# Altium PCB PD Stepper V1.PcbDoc (part 2 of 2)
Units mm, origin at the board's own origin, x right, y up, seen from the top; angles counter-clockwise.
Board outline 42.3 x 42.32 mm, 4 copper layers (Top Layer, Int1 (GND), Int2 (PWR), Bottom Layer), stack 1.451 mm thick; 69 components, 55 nets, 310 pads, 250 vias.
Unrouted connection lines stored in the file: 77.
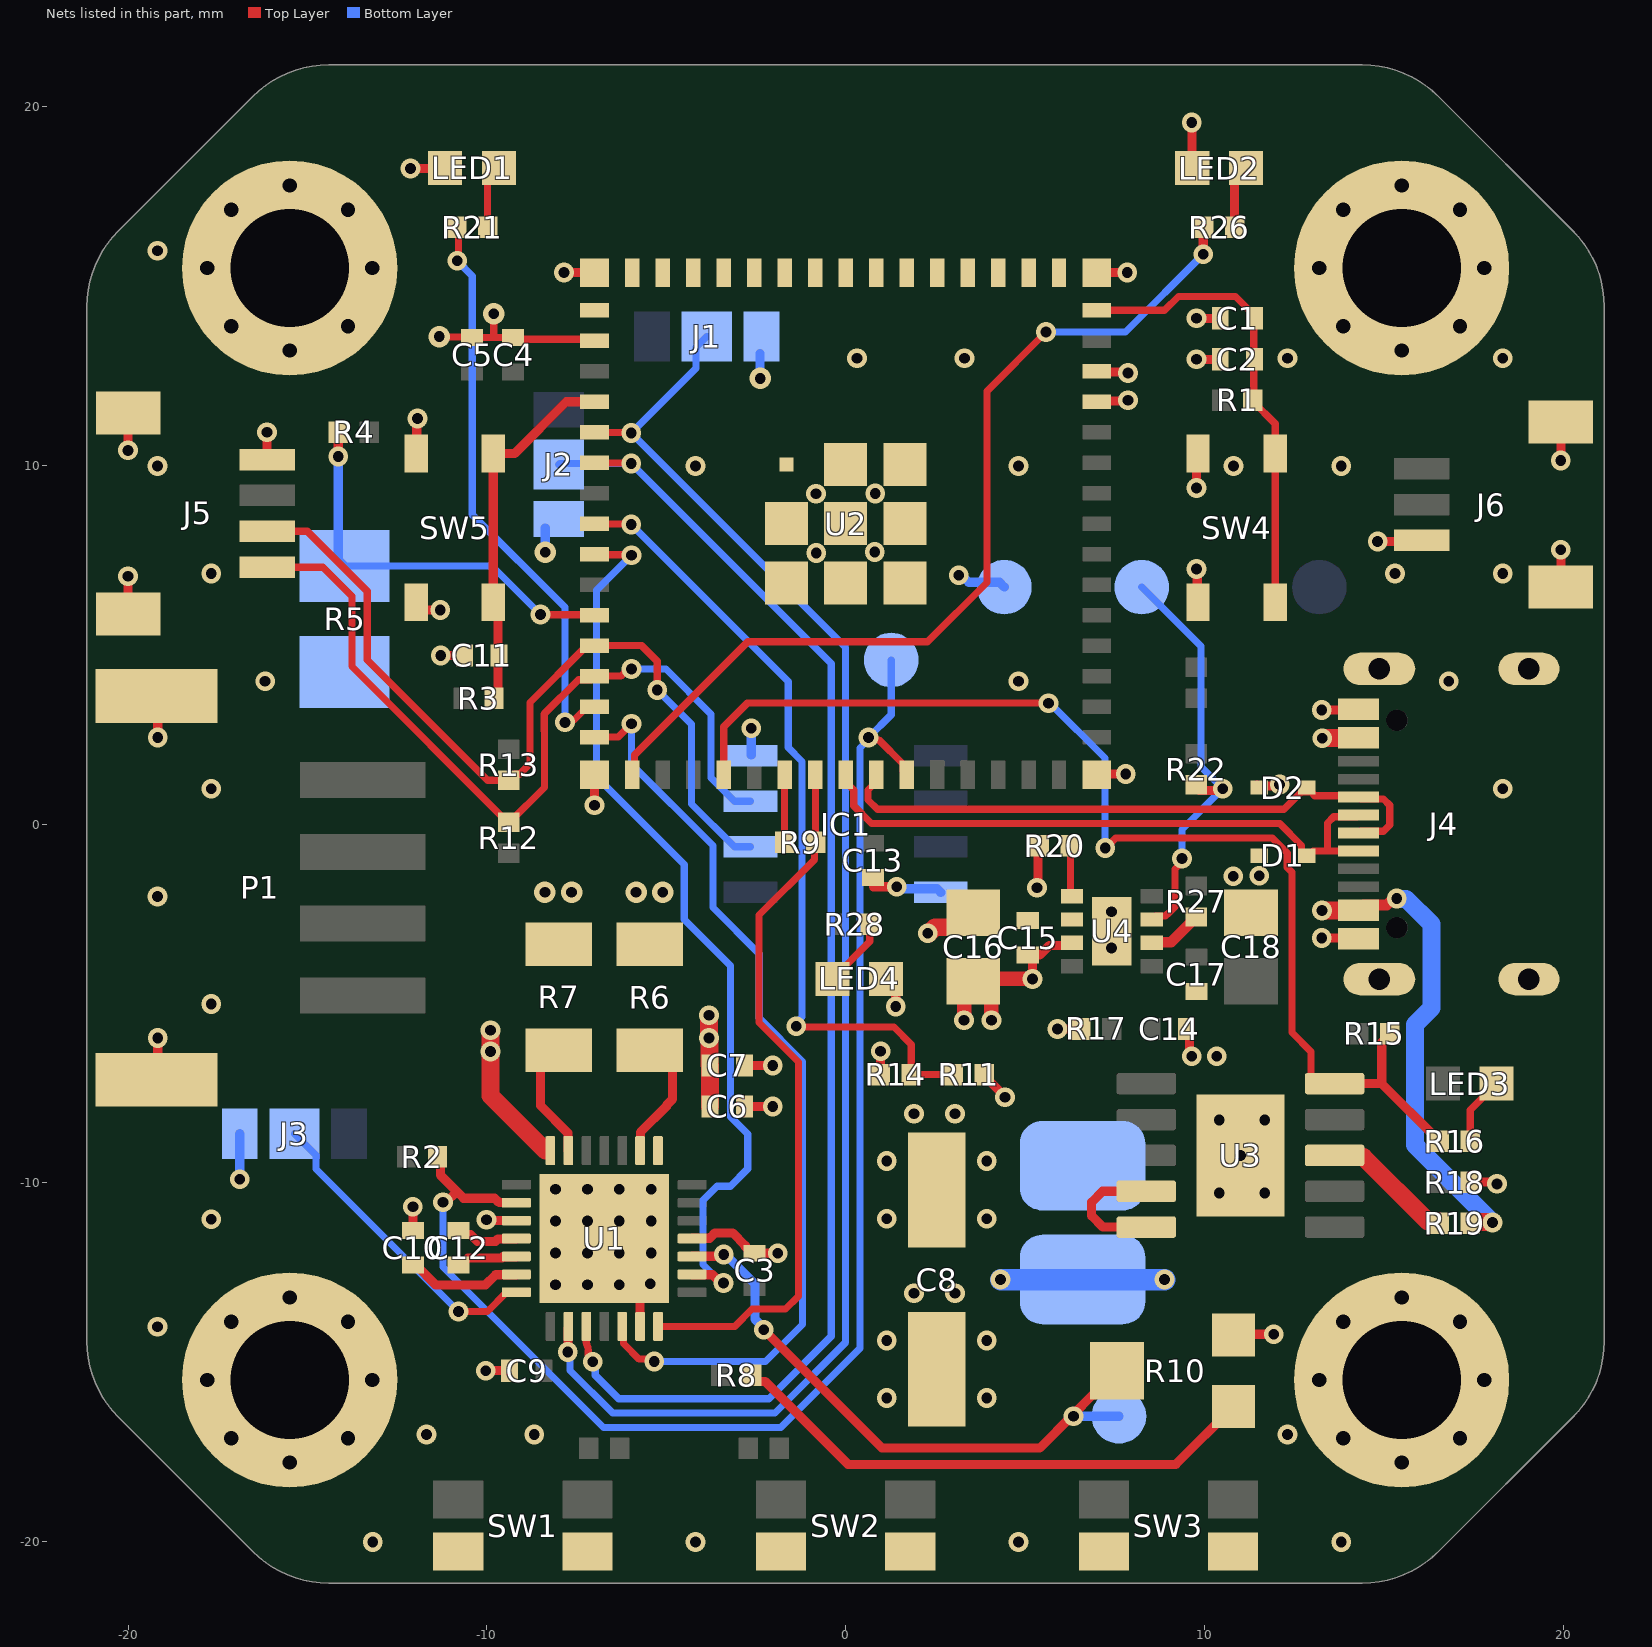
[diagram p4: the nets of this part, all layers, seen from the top]

## Via types
v1: diameter 0.55, hole 0.3, Top Layer to Bottom Layer, tented both sides, 180 vias
v2: diameter 0.7, hole 0.4, Top Layer to Bottom Layer, tented both sides, 32 vias
v3: diameter 0.6, hole 0.3, Top Layer to Bottom Layer, 16 vias
v4: diameter 0.6, hole 0.3, Top Layer to Bottom Layer, tented both sides, 14 vias
v5: diameter 1, hole 0.5, Top Layer to Bottom Layer, tented both sides, 8 vias

## Nets (pads, with @x,y where several pads share a name; then routed paths per layer and width w, separated by ;. In a path a pad name is that pad's centre, name@x,y a point inside that pad or via, vN(x,y) a via of type N, cw(c..) or ccw(c..) an arc to the next point about the centre after c; other vN are vias at no path point) (continued)
GND: C1.2 C2.2 C3.2 C4.2 C5.2 C6.1 C7.1 C8.2 C9.2 C11.2 C13.2 C14.1 C15.1 C16.2 C17.1 C18.2 D1.1 D2.1 IC1.4 IC1.8 J1.3 J2.3 J3.3 J4.A1_B12 J4.B1_A12 J4.S1 J4.S2 J4.S3 J4.S4 J5.1 J5.S1 J5.S2 J6.1 J6.S1 J6.S2 LED1.1 LED2.1 LED4.1 P1.P1 P1.P2 pad.34 pad.35@6.604,-12.7 pad.36@4.425,6.604 R5.1 R6.2 R7.2 R10.3 R14.1 R18.2 SW1.2_1 SW1.2_2 SW2.2_1 SW2.2_2 SW3.2_1 SW3.2_2 SW4.1 SW4.2 SW5.1 SW5.2 U1.3 U1.13 U1.18 U1.29 U2.1 U2.2 U2.42 U2.43 U2.46 U2.47 U2.48 U2.49 U2.50 U2.51 U2.52 U2.53 U2.54 U2.55 U2.56 U2.57 U2.58 U2.59 U2.60 U2.61 U2.61_1 U2.61_2 U2.61_3 U2.61_4 U2.61_5 U2.61_6 U2.61_7 U2.61_8 U2.62 U2.63 U2.64 U2.65 U3.0 U4.3 U4.11 | length 51.7
  Top Layer w0.2: v4(-11.332,13.589) -11.318,13.575 -10.428,13.575 C5.2@-10.414,13.561 -9.842,13.561 ; v4(-9.808,14.224) -9.808,13.595 -9.842,13.561 ; U2.2@-7,13.472 -7.044,13.516 -9.226,13.516 C4.2@-9.271,13.561 -9.842,13.561
  Top Layer w0.254: J5.S2@-20.004,6.257 v1(-20.004,6.904) ; v1(-20.004,10.416) J5.S1@-20.004,11.063 ; P1.P2@-19.212,-6.731 -19.177,-6.696 v1(-19.177,-5.969) ; P1.P1@-19.212,3.175 -19.177,3.14 v1(-19.177,2.413) ; v1(-16.129,10.922) -16.129,10.333 -15.956,10.16 J5.1@-15.605,10.16 ; v1(-12.129,18.276) LED1.1@-11.482,18.276 ; SW5.1@-11.975,6.196 -11.975,6.167 -11.777,5.969 v1(-11.303,5.969) ; SW5.2@-11.975,10.314 -11.956,10.332 -11.956,11.285 v1(-11.938,11.303) ; v1(-11.287,4.699) C11.2@-10.64,4.699 ; v1(-10.033,-15.24) -9.386,-15.24 C9.2@-9.378,-15.232 ; v1(-10.013,-11.034) -9.998,-11.049 -9.189,-11.049 U1.3@-9.181,-11.057 ; v1(-7.849,15.372) U2.62@-7,15.372 ; v1(-7,0.523) U2.63@-7,1.372 ; U1.29@-5.745,-13.193 -5.731,-13.207 U1.13@-5.731,-14.007 ; U1.18@-4.281,-11.557 -4.273,-11.549 -3.799,-11.549 -3.769,-11.519 -3.76,-11.519 -3.642,-11.401 -3.153,-11.401 -2.8,-11.754 -2.8,-11.781 -2.615,-11.966 C3.2@-2.54,-11.966 v1(-1.893,-11.966) ; C6.1@-2.806,-7.874 v1(-2.032,-7.874) ; C7.1@-2.806,-6.731 v1(-2.032,-6.731) ; 0.778,-1.75 v1(1.425,-1.75) ; R14.1@0.965,-6.985 0.97,-6.98 0.97,-6.343 v1(0.975,-6.338) ; LED4.1@1.385,-4.318 1.397,-4.33 v1(1.397,-5.09) ; v1(5.207,-4.318) 5.207,-3.782 5.334,-3.655 5.409,-3.655 5.678,-3.386 6.237,-3.386 U4.3@6.309,-3.313 ; U2.64@7,1.372 7.025,1.397 v1(7.807,1.397) ; U2.65@7,15.372 v1(7.849,15.372) ; U2.42@7.016,11.772 7.036,11.792 7.855,11.792 v1(7.874,11.811) ; U2.43@7.016,12.622 7.041,12.597 7.85,12.597 v1(7.874,12.573) ; C14.1@9.497,-5.715 9.586,-5.804 9.586,-6.331 9.652,-6.397 v1(9.652,-6.477) ; v1(9.652,19.558) 9.652,18.3 LED2.1@9.664,18.288 ; v1(9.779,7.112) 9.802,7.089 9.802,6.219 SW4.1@9.825,6.196 ; v1(9.779,9.37) SW4.2@9.779,10.017 ; v1(9.779,12.954) C2.2@10.426,12.954 ; v1(9.779,14.097) C1.2@10.426,14.097 ; R10.3@11.094,-14.224 v1(11.938,-14.224) ; D2.1@11.468,1.085 11.495,1.059 12.056,1.059 v1(12.099,1.101) ; v1(13.272,-3.175) J4.A1_B12@14.097,-3.175 ; v1(13.272,3.175) J4.B1_A12@14.097,3.175 ; v1(14.831,7.874) J6.1@15.478,7.874 ; R18.2@17.585,-9.898 17.663,-9.976 18.104,-9.976 v1(18.161,-10.033) ; J6.S1@19.939,7.001 v1(19.939,7.648) ; v1(19.939,10.132) J6.S2@19.939,10.779
  Top Layer w0.4: v1(3.302,-5.473) C16.2@3.302,-4.826 ; C16.2@3.887,-4.302 3.903,-4.318 v1(5.207,-4.318) ; v1(4.064,-5.473) C16.2@4.064,-4.826
  Bottom Layer w0.254: v1(-16.891,-9.906) J3.3@-16.891,-8.636 ; J2.3@-8.382,8.255 -8.375,8.248 v4(-8.375,7.573) ; IC1.8@-2.633,1.922 v1(-2.633,2.667) ; v4(-2.384,12.422) J1.3@-2.384,13.112 ; v1(1.425,-1.75) 1.482,-1.807 2.552,-1.807 IC1.4@2.65,-1.905 ; v1(3.155,6.937) 3.235,6.937 3.433,6.739 4.29,6.739 pad.36@4.425,6.604
  Bottom Layer w0.6: v1(4.318,-12.7) pad.35@6.604,-12.7 v1(8.89,-12.7)
  other v1: -13.184,-20.018 -4.184,-20.018 4.816,-20.018 13.816,-20.018 -11.684,-17.018 -8.684,-17.018 12.316,-17.018 1.143,-16.002 3.937,-16.002 1.143,-14.398 3.937,-14.398 -19.184,-14.018 1.905,-13.081 3.048,-13.081 -17.684,-11.018 10.414,-10.287 11.684,-10.287 11.007,-9.239 10.414,-8.255 11.684,-8.255 10.347,-6.477 -17.684,-5.018 7.413,-3.456 7.413,-2.444 -19.184,-2.018 10.804,-1.458 11.532,-1.444 -17.684,0.982 18.316,0.982 -16.184,3.982 4.816,3.982 16.816,3.982 -17.684,6.982 15.316,6.982 18.316,6.982 -0.819,7.556 0.809,7.581 -0.825,9.21 0.828,9.216 -19.184,9.982 -4.184,9.982 4.816,9.982 10.816,9.982 13.816,9.982 0.316,12.982 3.316,12.982 12.316,12.982 18.316,12.982 -19.184,15.982
  other v2: -15.5,-17.8 15.5,-17.8 -17.126,-17.126 -13.874,-17.126 13.874,-17.126 17.126,-17.126 -17.8,-15.5 -13.2,-15.5 13.2,-15.5 17.8,-15.5 -17.126,-13.874 -13.874,-13.874 13.874,-13.874 17.126,-13.874 -15.5,-13.2 15.5,-13.2 -15.5,13.2 15.5,13.2 -17.126,13.874 -13.874,13.874 13.874,13.874 17.126,13.874 -17.8,15.5 -13.2,15.5 13.2,15.5 17.8,15.5 -17.126,17.126 -13.874,17.126 13.874,17.126 17.126,17.126 -15.5,17.8 15.5,17.8
  other v3: -8.088,-12.847 -7.199,-12.847 -6.31,-12.847 -5.45,-12.818 -8.088,-11.958 -7.199,-11.958 -6.31,-11.958 -5.421,-11.958 -8.088,-11.069 -7.199,-11.069 -6.31,-11.069 -5.421,-11.069 -8.088,-10.18 -7.199,-10.18 -6.31,-10.18 -5.421,-10.18
  other v4: -8.382,-1.905 -7.64,-1.905 -5.842,-1.905 -5.1,-1.905
INDEX: U1.12 U2.15 | length 26
  Top Layer w0.2: U2.15@-7,2.422 -6.341,2.422 v1(-5.969,2.794) ; U1.12@-6.231,-14.007 -6.196,-14.042 -6.196,-14.486 -5.763,-14.919 -5.401,-14.919 v1(-5.334,-14.986)
  Bottom Layer w0.2: v1(-5.969,2.794) -5.969,1.668 -3.7,-0.601 -3.7,-2.329 -2.408,-3.621 -2.408,-5.416 -1.2,-6.624 -1.2,-13.952 -2.234,-14.986 v1(-5.334,-14.986)
LED1: R21.2 U2.14 | length 16
  Top Layer w0.2: v1@-10.795,15.734 R21.2@-10.795,16.637 ; v1(-7.826,2.833) -7.759,2.9 -7.572,2.9 -7.2,3.272 U2.14@-7,3.272
  Bottom Layer w0.2: v1(-10.829,15.7) -10.408,15.279 -10.408,8.624 -7.826,6.041 v1(-7.826,2.833)
LED2: R26.2 U2.16 | length 26
  Top Layer w0.2: U2.16@-5.95,1.372 -5.882,1.44 -5.882,1.928 -2.73,5.08 2.286,5.08 3.937,6.731 3.937,12.065 v1(5.588,13.716)
  Top Layer w0.254: v1(9.97,15.883) R26.2@9.97,16.53
  Bottom Layer w0.2: v1(5.588,13.716) 7.804,13.716 v1(9.97,15.883)
MS1: J1.2 U1.9 U2.5 | length 42.6
  Top Layer w0.2: U2.5@-6.993,10.915 v1@-5.991,10.915
  Top Layer w0.254: v1(-7.748,-14.723) -7.739,-14.714 -7.739,-14.06 U1.9@-7.731,-14.052
  Bottom Layer w0.2: v1(-7.748,-14.723) -7.681,-14.79 -7.681,-15.233 -6.492,-16.421 -2.197,-16.421 -1.972,-16.421 0,-14.449 0,-14.224 0,4.924 v1(-5.976,10.9) -4.17,12.706 -4.17,13.291 J1.2@-3.872,13.589
MS2: J2.2 U1.10 U2.6 | length 38.7
  Top Layer w0.2: U1.10@-7.231,-14.007 -7.231,-14.429 ccw(c-7.031,-14.428) -7.216,-14.503 cw(c-7.748,-14.723) -7.176,-14.787 ccw(c-6.977,-14.808) v1(-7.049,-14.995) ; U2.6@-6.993,10.065 v1@-5.991,10.065
  Bottom Layer w0.2: J2.2@-8.001,10.025 -7.976,10.05 v1(-5.976,10.05) -0.4,4.474 -0.4,-14.058 -0.4,-14.283 -2.138,-16.021 -2.363,-16.021 -6.327,-16.021 -6.982,-15.366 -6.982,-15.062 v1(-7.049,-14.995)
NetC1_1: C1.1 C2.1 R1.1 SW4.3 SW4.4 U2.45 | length 13.1
  Top Layer w0.2: U2.45@7,14.322 8.891,14.322 9.276,14.707 10.867,14.707 11.402,14.172 C1.1@11.402,14.097 11.378,14.073 11.378,11.835 R1.1@11.354,11.811 11.354,11.781 11.975,11.16 SW4.4@11.975,10.33 SW4.3@11.975,6.18
NetC10_1: C10.1 U1.6 | length 3.2
  Top Layer w0.254: C10.1@-12.065,-12.291 -11.99,-12.291 -11.428,-12.853 -10.042,-12.853 -9.754,-12.565 -9.189,-12.565 U1.6@-9.181,-12.557
NetC11_1: C11.1 R3.1 SW5.3 SW5.4 U2.4 | length 10.4
  Top Layer w0.254: R3.1@-9.694,3.363 -9.694,6.049 SW5.3@-9.825,6.18 SW5.4@-9.825,10.33 -9.228,10.33 -7.786,11.772 U2.4@-7,11.772
NetC12_1: C12.1 U1.4 | length 1.8
  Top Layer w0.254: C12.1@-10.795,-11.331 -10.687,-11.439 -10.46,-11.439 -10.263,-11.636 -9.764,-11.636 -9.693,-11.565 -9.189,-11.565 U1.4@-9.181,-11.557
NetC12_2: C12.2 U1.5 | length 1.7
  Top Layer w0.254: C12.2@-10.795,-12.291 -10.72,-12.291 -10.524,-12.095 -9.581,-12.095 -9.551,-12.065 -9.189,-12.065 U1.5@-9.181,-12.057
NetLED1_2: LED1.2 R21.1 | length 1.8
  Top Layer w0.2: R21.1@-9.982,16.637 -9.982,17.97 LED1.2@-9.664,18.288
NetLED2_2: LED2.2 R26.1 | length 1.8
  Top Layer w0.254: R26.1@10.846,16.637 10.846,17.97 LED2.2@11.164,18.288
NetLED3_1: LED3.1 R16.2 | length 1.9
  Top Layer w0.2: R16.2@17.415,-8.844 17.415,-7.973 LED3.1@18.149,-7.239
NetLED4_2: LED4.2 R28.1 | length 2
  Top Layer w0.2: LED4.2@-0.369,-4.318 0.672,-3.277 0.672,-2.808 R28.1@0.686,-2.794
NetR6_1: R6.1 U1.23 | length 3.5
  Top Layer w0.254: U1.23@-5.731,-9.107 -5.723,-9.099 -5.723,-8.598 -4.98,-7.855 -4.98,-7.825 -4.826,-7.671 -4.826,-6.78 -5.304,-6.302 R6.1@-5.461,-6.302
NetR7_1: R7.1 U1.27 | length 3.4
  Top Layer w0.254: R7.1@-8.001,-6.302 -8.031,-6.302 -8.509,-6.78 -8.509,-7.846 -7.739,-8.616 -7.739,-9.099 U1.27@-7.731,-9.107
NetR8_1: R8.1 R10.1 | length 15.1
  Top Layer w0.254: R8.1@-2.616,-15.367 -2.616,-15.397 -2.473,-15.54 -2.247,-15.54 0.066,-17.853 9.204,-17.853 R10.1@10.817,-16.24
NetR19_2: R19.2 U3.8 | length 3.7
  Top Layer w0.5: U3.8@13.632,-9.239 13.682,-9.289 14.44,-9.289 16.231,-11.08 16.531,-11.08 16.551,-11.1 R19.2@16.551,-11.13
NetR20_1: R20.1 U4.1 | length 1.4
  Top Layer w0.2: R20.1@6.266,-0.607 6.266,-1.97 U4.1@6.309,-2.013
NetR27_1: R27.1 U4.6 | length 1.6
  Top Layer w0.3: U4.6@8.534,-3.313 8.548,-3.3 9.07,-3.3 9.629,-2.741 9.629,-2.711 9.749,-2.591 R27.1@9.779,-2.591
NetU3_4: U3.4 U3.5 | length 3.7
  Top Layer w0.254: U3.5@8.382,-11.239 7.175,-11.239 6.858,-10.922 6.858,-10.541 7.16,-10.239 U3.4@8.382,-10.239
NTC: R4.2 R5.2 U2.11 | length 11.3
  Top Layer w0.2: v1(-8.509,5.842) -8.499,5.832 -7.01,5.832 U2.11@-7,5.822
  Top Layer w0.254: v1(-14.146,10.248) R4.2@-14.146,10.837
  Bottom Layer w0.2: R5.2@-13.97,7.191 -9.858,7.191 v1(-8.509,5.842)
  Bottom Layer w0.254: v1(-14.146,10.248) -14.146,7.367 R5.2@-13.97,7.191
PDN_UART: R9.2 U1.14 U2.22 | length 19.9
  Top Layer w0.2: U1.14@-5.231,-14.007 -3.092,-14.007 -2.607,-13.522 -1.676,-13.522 -1.318,-13.164 -1.318,-6.632 -2.413,-5.537 -2.413,-2.54 -0.864,-0.991 -0.864,-0.534 R9.2@-0.838,-0.508 -0.844,-0.502 -0.844,1.366 U2.22@-0.85,1.372
PG: R15.1 R16.1 U2.19 U3.10 | length 33.1
  Top Layer w0.2: U2.19@-3.4,1.372 -3.4,2.713 -2.744,3.369 v1(5.655,3.369) ; v1(7.239,-0.668) 7.252,-0.668 7.531,-0.389 11.896,-0.389 12.312,-0.805 12.312,-1.213 12.446,-1.347 12.446,-5.815 12.977,-6.346 12.977,-7.039 13.177,-7.239 U3.10@13.632,-7.239
  Top Layer w0.254: U3.10@13.632,-7.239 14.946,-7.239 ; R15.1@15.164,-5.842 15.164,-5.872 14.946,-6.09 14.946,-7.239 ; R16.1@16.551,-8.844 16.551,-8.814 16.408,-8.671 16.378,-8.671 15.027,-7.321 14.946,-7.239
  Bottom Layer w0.2: v1(5.655,3.369) 5.699,3.369 7.232,1.836 7.232,-0.661 v1(7.239,-0.668)
PG_3V3: pad.36@8.255,6.604 R22.1 U4.7 | length 11.9
  Top Layer w0.2: U4.7@8.534,-2.663 8.634,-2.563 8.91,-2.563 8.96,-2.513 8.971,-2.513 9.179,-2.305 9.179,-1.255 9.376,-1.059 v1(9.376,-0.964)
  Top Layer w0.254: R22.1@9.87,0.929 10.457,0.929 v1(10.514,0.986)
  Bottom Layer w0.2: pad.36@8.255,6.604 9.906,4.953 9.906,1.594 v1(10.514,0.986) 9.376,-0.152 v1(9.376,-0.964)
SCL: IC1.7 J5.4 R12.1 U2.13 | length 23.1
  Top Layer w0.2: J5.4@-16.129,7.16 -14.574,7.16 -13.764,6.35 -13.764,4.387 -9.428,0.051 R12.1@-9.398,0.051 -9.368,0.051 -8.398,1.021 -8.398,2.592 -8.401,2.595 -8.401,3.071 -7.45,4.022 -7.1,4.022 U2.13@-7,4.122 -6.26,4.122 -6.064,4.318 v1(-5.969,4.318)
  Bottom Layer w0.2: v1(-5.969,4.318) -5.011,4.318 -3.753,3.06 -3.753,1.288 -3.1,0.635 IC1.7@-2.65,0.635
SDA: IC1.6 J5.3 R13.1 U2.12 | length 24.1
  Top Layer w0.2: J5.3@-16.129,8.16 -15.009,8.16 -13.335,6.486 -13.335,4.572 -9.982,1.219 R13.1@-9.398,1.219 -9.228,1.389 -9.091,1.389 -8.798,1.682 -8.798,2.427 -8.801,2.429 -8.801,3.384 -7.285,4.899 -7.073,4.899 U2.12@-7,4.972 -5.683,4.972 -5.25,4.539 v1(-5.25,3.736)
  Bottom Layer w0.2: v1(-5.25,3.736) -4.296,2.782 -4.296,0.561 -3.1,-0.635 IC1.6@-2.65,-0.635
SPREAD: J3.2 U1.7 | length 8.7
  Top Layer w0.2: v1(-10.795,-13.589) -9.983,-13.589 -9.451,-13.057 U1.7@-9.181,-13.057
  Bottom Layer w0.2: J3.2@-15.367,-8.636 -14.767,-9.236 -14.767,-9.617 v1(-10.795,-13.589)
STEP: U1.16 U2.9 | length 25.5
  Top Layer w0.2: U2.9@-7,7.522 -6.986,7.507 -5.983,7.507 v1(-5.969,7.493)
  Top Layer w0.254: U1.16@-4.281,-12.557 -4.273,-12.565 -3.711,-12.565 -3.483,-12.793 v1(-3.403,-12.793)
  Bottom Layer w0.2: v1(-5.969,7.493) -6.944,6.518 -6.944,1.318 -4.5,-1.126 -4.5,-2.661 -3.208,-3.953 -3.208,-8.16 -2.729,-8.639 -2.729,-9.614 -3.213,-10.098 -3.583,-10.098 -3.976,-10.491 -3.976,-12.28 -3.463,-12.793 v1(-3.403,-12.793)
TMC_E\N\: pad.36@1.27,4.572 R2.1 U1.2 U2.25 | length 40.9
  Top Layer w0.2: v1(0.635,2.413) 0.702,2.346 0.926,2.346 1.6,1.672 1.6,1.472 U2.25@1.7,1.372
  Top Layer w0.254: R2.1@-11.379,-9.271 -11.295,-9.355 -11.295,-9.787 -10.821,-10.261 ; v1(-11.223,-10.546) -11.143,-10.546 -10.858,-10.261 -10.821,-10.261 ; U1.2@-9.181,-10.557 -9.189,-10.549 -9.647,-10.549 -9.677,-10.519 -9.702,-10.519 -9.789,-10.432 -10.65,-10.432 -10.821,-10.261
  Bottom Layer w0.2: v1(-11.223,-10.546) -11.223,-12.347 -6.75,-16.821 -1.807,-16.821 0.4,-14.614 0.4,2.121 0.635,2.356 v1(0.635,2.413) 1.27,3.048 pad.36@1.27,4.572
TX: R9.1 U2.21 | length 1.9
  Top Layer w0.2: R9.1@-1.702,-0.508 R9.1@-1.702,-0.508 U2.21@-1.701,1.371 ; U2.21@-1.701,1.371 U2.21@-1.7,1.372
USB_D_N: D1.2 J4.A7 J4.B7 U2.23 | length 17.5
  Top Layer w0.2: U2.23@0,1.372 0,1.172 0.225,0.947 0.225,0.506 0.72,0.011 12.101,0.011 12.712,-0.6 12.712,-0.789 12.812,-0.889 12.892,-0.889 13.031,-0.75 13.462,-0.75 ; J4.B7@14.3,-0.75 13.462,-0.75 ; J4.A7@14.3,0.25 14.25,0.2 13.606,0.2 13.43,0.024 13.43,-0.718 13.462,-0.75
USB_D_P: D2.2 J4.A6 J4.B6 U2.24 | length 17.3
  Top Layer w0.2: U2.24@0.85,1.372 0.85,1.172 0.625,0.947 0.625,0.672 0.886,0.411 12.222,0.411 12.7,0.889 12.979,0.889 13.079,0.789 14.261,0.789 J4.B6@14.3,0.75 14.35,0.7 14.994,0.7 15.17,0.524 15.17,-0.024 14.994,-0.2 14.35,-0.2 J4.A6@14.3,-0.25
VBUS: C6.2 C7.2 C8.1 C10.2 C15.2 C16.1 J4.A4_B9 J4.B4_A9 pad.35@6.604,-9.525 R11.2 R17.2 R19.1 R20.2 U1.22 U1.28 U4.2 | length 26.1
  Top Layer w0.254: C10.2@-12.065,-11.315 v1(-12.065,-10.668) ; R11.2@3.861,-6.985 3.861,-7.015 4.445,-7.599 v1(4.445,-7.62) ; v1(5.334,-1.778) 5.368,-1.744 5.368,-0.641 R20.2@5.402,-0.607 ; v1(5.906,-5.715) R17.2@6.553,-5.715
  Top Layer w0.3: J4.A4_B9@14.3,-2.4 14.443,-2.257 15.084,-2.257 15.218,-2.123 15.384,-2.123 v1@15.398,-2.109 ; v1(15.364,-2.075) v1@15.398,-2.109 ; v1@15.412,-2.123 v1@15.398,-2.109 ; v1@15.432,-2.075 v1@15.398,-2.109
  Top Layer w0.5: v1(-9.898,-5.748) -9.898,-7.575 -8.366,-9.107 ; v1(-3.81,-5.334) v1(-3.81,-5.969) -3.81,-5.983 -3.797,-5.996 -3.797,-6.716 C7.2@-3.782,-6.731 C6.2@-3.782,-7.874 ; v1(2.286,-3.048) 2.295,-3.057 2.309,-3.057 2.488,-2.879 3.41,-2.879 C16.1@3.81,-2.479 ; v1(13.28,-2.412) 13.286,-2.406 14.294,-2.406 J4.A4_B9@14.3,-2.4 ; v1@13.292,2.4 J4.B4_A9@14.3,2.4 ; R19.1@17.643,-11.099 18.024,-11.099 v1(18.034,-11.109)
  Bottom Layer w0.5: v1(15.364,-2.075) 15.374,-2.085 15.626,-2.085 16.33,-2.789 16.33,-5.133 15.874,-5.589 15.874,-8.949 v1(18.034,-11.109)
  other v1: 1.143,-11.002 3.937,-11.002 1.143,-9.398 3.937,-9.398 1.905,-8.081 3.048,-8.081 -9.898,-6.342 13.286,2.394
VBUS_SENSE: R11.1 R14.2 U2.8 | length 22.4
  Top Layer w0.2: U2.8@-6.993,8.365 v1@-5.991,8.365 ; v1(-1.375,-5.636) -1.348,-5.663 1.345,-5.663 1.829,-6.147 R14.2@1.829,-6.985 R11.1@2.997,-6.985
  Bottom Layer w0.2: v1(-5.976,8.35) -1.6,3.974 -1.6,2.13 -1.213,1.743 -1.213,-5.38 -1.375,-5.541 v1(-1.375,-5.636)
VREF: pad.36@7.62,-16.51 R10.2 U1.17 | length 16.9
  Top Layer w0.254: U1.17@-4.281,-12.057 -4.273,-12.049 -3.446,-12.049 v1(-3.401,-12.004) ; v1(-2.286,-14.097) 1.016,-17.399 5.408,-17.399 6.324,-16.484 6.894,-15.913 6.944,-15.913 7.567,-15.29 R10.2@7.567,-15.24
  Bottom Layer w0.254: v1(-3.401,-12.004) -3.34,-12.004 -2.531,-12.813 -2.531,-13.8 -2.286,-14.045 v1(-2.286,-14.097) ; v1(6.35,-16.51) pad.36@7.62,-16.51
pads on no net: IC1.3 IC1.5 J4. J4.A8 J4.B8 U1.20 U1.25 U2.7 U2.26 U2.28 U2.29 U2.35 U2.36 U2.37 U2.38 U2.39 U2.40 U2.41 U2.44 U4.8

## Polygon pours and split planes (outlines as drawn)
GND on Bottom Layer "GND_L04_P000" (solid, remove dead copper, pour order 0): -23.749,24.384 -23.749,-23.368 25.146,-23.368 25.146,24.511
GND on Top Layer " " (solid, remove dead copper, pour order 1): -23.749,24.384 -23.749,-23.368 25.146,-23.368 25.146,24.511
3V3 on Int2 (PWR) (split plane): 14.625,20.642 14.84,20.614 15.052,20.567 15.26,20.502 15.46,20.418 15.653,20.318 15.837,20.201 16.009,20.069 16.157,19.933 16.168,19.92 19.91,16.178 19.923,16.167 20.059,16.019 20.191,15.847 20.308,15.663 20.408,15.47 20.492,15.27 20.557,15.062 20.604,14.85 20.632,14.635 20.641,14.433 20.64,14.417 20.64,-14.417 20.641,-14.433 20.632,-14.635 20.604,-14.85 20.557,-15.062 20.492,-15.27 20.408,-15.47 20.308,-15.663 20.191,-15.847 20.059,-16.019 19.923,-16.167 19.91,-16.178 16.168,-19.92 16.157,-19.933 16.009,-20.069 15.837,-20.201 15.653,-20.318 15.46,-20.418 15.26,-20.502 15.052,-20.567 14.84,-20.614 14.625,-20.642 14.423,-20.651 14.407,-20.65 -14.407,-20.65 -14.423,-20.651 -14.625,-20.642 -14.84,-20.614 -15.052,-20.567 -15.26,-20.502 -15.46,-20.418 -15.653,-20.318 -15.837,-20.201 -16.009,-20.069 -16.157,-19.933 -16.168,-19.92 -19.91,-16.178 -19.923,-16.167 -20.059,-16.019 -20.191,-15.847 -20.308,-15.663 -20.408,-15.47 -20.492,-15.27 -20.557,-15.062 -20.604,-14.85 -20.632,-14.635 -20.641,-14.433 -20.64,-14.417 -20.64,14.417 -20.641,14.433 -20.632,14.635 -20.604,14.85 -20.557,15.062 -20.492,15.27 -20.408,15.47 -20.308,15.663 -20.191,15.847 -20.059,16.019 -19.923,16.167 -19.91,16.178 -16.168,19.92 -16.157,19.933 -16.009,20.069 -15.837,20.201 -15.653,20.318 -15.46,20.418 -15.26,20.502 -15.052,20.567 -14.84,20.614 -14.625,20.642 -14.423,20.651 -14.407,20.65 -8.636,20.65 -8.636,15.748 8.636,15.748 8.636,20.65 14.407,20.65 14.423,20.651
VBUS on Int2 (PWR) (split plane): 15.57,3.505 16.131,2.944 16.131,-2.436 14.882,-3.685 9.398,-3.685 9.333,-3.693 9.272,-3.719 9.242,-3.741 9.22,-3.759 5.972,-7.006 5.918,-7.061 5.878,-7.113 5.852,-7.174 5.844,-7.239 5.844,-10.31 4.527,-11.626 -1.972,-11.626 -2.037,-11.635 -2.098,-11.66 -2.15,-11.7 -4.676,-14.226 -9.04,-14.226 -12.575,-10.691 -12.575,-8.105 -8.786,-4.316 -1.778,-4.316 -1.713,-4.308 -1.652,-4.282 -1.6,-4.242 6.073,3.431 11.303,3.431 11.368,3.439 11.429,3.465 11.481,3.505 12.123,4.147 14.928,4.147
GND on Int1 (GND) (split plane): 14.625,20.642 14.84,20.614 15.052,20.567 15.26,20.502 15.46,20.418 15.653,20.318 15.837,20.201 16.009,20.069 16.157,19.933 16.168,19.92 19.91,16.178 19.923,16.167 20.059,16.019 20.191,15.847 20.308,15.663 20.408,15.47 20.492,15.27 20.557,15.062 20.604,14.85 20.632,14.635 20.641,14.433 20.64,14.417 20.64,-14.417 20.641,-14.433 20.632,-14.635 20.604,-14.85 20.557,-15.062 20.492,-15.27 20.408,-15.47 20.308,-15.663 20.191,-15.847 20.059,-16.019 19.923,-16.167 19.91,-16.178 16.168,-19.92 16.157,-19.933 16.009,-20.069 15.837,-20.201 15.653,-20.318 15.46,-20.418 15.26,-20.502 15.052,-20.567 14.84,-20.614 14.625,-20.642 14.423,-20.651 14.407,-20.65 -14.407,-20.65 -14.423,-20.651 -14.625,-20.642 -14.84,-20.614 -15.052,-20.567 -15.26,-20.502 -15.46,-20.418 -15.653,-20.318 -15.837,-20.201 -16.009,-20.069 -16.157,-19.933 -16.168,-19.92 -19.91,-16.178 -19.923,-16.167 -20.059,-16.019 -20.191,-15.847 -20.308,-15.663 -20.408,-15.47 -20.492,-15.27 -20.557,-15.062 -20.604,-14.85 -20.632,-14.635 -20.641,-14.433 -20.64,-14.417 -20.64,14.417 -20.641,14.433 -20.632,14.635 -20.604,14.85 -20.557,15.062 -20.492,15.27 -20.408,15.47 -20.308,15.663 -20.191,15.847 -20.059,16.019 -19.923,16.167 -19.91,16.178 -16.168,19.92 -16.157,19.933 -16.009,20.069 -15.837,20.201 -15.653,20.318 -15.46,20.418 -15.26,20.502 -15.052,20.567 -14.84,20.614 -14.625,20.642 -14.423,20.651 -14.407,20.65 -8.763,20.65 -8.763,15.748 8.509,15.748 8.509,20.65 14.407,20.65 14.423,20.651

## Other copper
Top Layer:
  rectangle net GND: -6.391,-3.955 -4.531,-1.397
  rectangle net GND: -8.931,-3.955 -7.071,-1.397
  pour cut-out: -9.398,-1.083 -9.398,-7.493 -8.636,-8.255 -4.826,-8.255 -4.171,-7.6 -4.171,-1.083
  region net GND: 12.053,-2.479 12.053,-1.37 11.721,-1.038 10.773,-1.038 10.426,-1.385 10.426,-2.352 10.553,-2.479
  pour cut-out: -8.907,21.16 -8.907,17.1 -7.7,15.893 7.638,15.893 8.89,17.145 8.89,21.16 8.412,21.16
  region net GND: 10.16,-5.894 10.41,-6.138 10.676,-6.138 10.676,-6.785 9.476,-6.785 9.262,-6.571 9.262,-5.486 9.525,-5.223 9.525,-4.436 10.16,-4.436
  region net VBUS: 6.622,-2.463 6.622,-2.863 5.882,-2.863 5.815,-2.93 5.024,-2.93 4.825,-3.129 3.06,-3.129 3.06,-1.829 4.661,-1.829 5.157,-1.445 5.693,-1.445 5.693,-2.46 6.619,-2.46
  region net 3V3: 8.222,-4.163 9.252,-4.163 10.2,-4.163 10.426,-4.389 10.426,-5.842 12.053,-5.842 12.053,-3.73 11.926,-3.603 10.3,-3.603 10.173,-3.476 9.478,-3.476 9.191,-3.763 8.222,-3.763
  region net VBUS: 3.647,-11.8 4.445,-11.002 4.445,-8.716 3.302,-7.573 1.778,-7.573 0.762,-8.589 0.762,-11.129 1.433,-11.8 2.54,-11.8
  region net GND: 3.647,-16.8 4.445,-16.002 4.445,-13.716 3.302,-12.573 1.778,-12.573 0.762,-13.589 0.762,-16.129 1.433,-16.8 2.54,-16.8
  region net VBUS: -8.231,-8.702 -8.626,-8.702 -8.698,-8.775 -8.698,-9.124 -8.344,-9.478 -8.096,-9.478 -8.096,-8.837
  region net VBUS: -5.231,-9.512 -5.067,-9.512 -3.547,-7.992 -3.547,-7.366 -3.911,-7.366 -5.366,-8.821 -5.366,-9.377
  region net B1: -7.096,-9.107 -7.096,-8.664 -6.858,-8.426 -6.858,-7.239 -7.747,-7.239 -7.874,-7.366 -7.874,-8.001 -7.366,-8.509 -7.366,-9.107
  region net A2: -4.551,-10.192 -3.461,-10.192 -2.794,-9.525 -2.794,-9.017 -3.175,-8.636 -3.81,-8.636 -4.686,-9.512 -4.686,-10.057
  region net B2: -8.881,-10.192 -8.777,-10.088 -8.775,-9.64 -9.471,-8.944 -10.341,-8.944 -10.618,-9.221 -10.618,-9.829 -10.414,-10.033 -9.711,-10.033 -9.552,-10.192
  region net A1: -6.096,-9.107 -6.096,-8.509 -5.461,-7.874 -5.461,-7.366 -5.63,-7.197 -6.512,-7.197 -6.512,-8.522 -6.366,-8.668 -6.366,-8.736 -6.366,-9.107
Bottom Layer:
  rectangle net GND: -8.509,-13.335 -4.953,-9.779
  pour cut-out: -9.398,-1.083 -9.398,-7.493 -8.636,-8.255 -4.826,-8.255 -4.171,-7.6 -4.171,-1.083
  pour cut-out: -8.907,21.16 -8.907,17.1 -7.7,15.893 7.638,15.893 8.89,17.145 8.89,21.16 8.412,21.16
  region net VBUS: 6.211,-10.775 4.719,-10.775 4.064,-11.43 3.556,-11.43 3.556,-9.271 4.191,-8.636 6.211,-8.636
Int1 (GND) (plane layer: these items are gaps in the copper):
  rectangle: -8.763,15.748 8.509,21.16
  lines w0.5: -8.744,-9.779 -9.506,-9.017 -9.506,-1.27 -6.721,-1.27 ; -6.689,-8.467 -6.721,-8.434 -6.721,-1.27 ; -4.699,-9.779 -3.937,-9.017 -3.937,-1.27 -6.721,-1.27
Int2 (PWR) (plane layer: these items are gaps in the copper):
  rectangle: -8.636,15.748 8.636,21.16
  lines w0.5: -12.827,-10.795 -9.144,-14.478 -4.572,-14.478 -1.972,-11.878 1.457,-11.878 4.632,-11.878 6.096,-10.414 6.096,-7.239 6.151,-7.184 9.398,-3.937 14.986,-3.937 16.383,-2.54 16.383,3.048 15.748,3.683 15.032,4.399 12.019,4.399 11.303,3.683 5.969,3.683 -1.778,-4.064 -8.89,-4.064 -12.827,-8.001 -12.827,-10.795

## Silkscreen, mask and mechanical layers (free items; w line width, h text height)
Top Overlay:
  lines w0.1: -10.922,-1.924 -11.43,-1.924 -11.43,-5.48 -10.795,-5.48 ; -10.922,2.076 -11.43,2.076 -11.43,-1.48 -10.795,-1.48 ; 7.493,-6.477 8.001,-6.477 8.255,-6.223 ; 8.093,-6.223 8.255,-6.223 ; 10.026,-5.207 10.28,-5.461 11.43,-5.461 11.684,-5.715 ; 8.255,-6.223 8.255,-6.395 8.255,-6.223
  lines w0.15: 10.961,-12.568 cw(c11.088,-14.092) 12.612,-13.965 ; 11.303,-12.954 10.922,-12.573 11.303,-12.192 ; 12.319,-12.7 13.081,-12.7 ; 12.7,-13.081 12.7,-12.319
  text "LED1" at -11.993,19.575 h1.52
  text "LED2" at 8.835,19.575 h1.52
  text "I2C" at -20.392,12.727 h1.1
  text "AUX" at 18.012,12.355 h1.1
  text "BOOT" at -14.191,10.028 h1.52 r270
  text "RST" at 14.205,6.957 h1.52 r90
  text "A" at -11.176,1.822 h1.8 r270
  text "1" at -11.176,0.425 h1 r270
  text "B" at -11.176,-0.337 h1.8 r270
  text "A" at -11.176,-2.242 h1.8 r270
  text "2" at -11.176,-3.638 h1 r270
  text "B" at -11.176,-4.318 h1.8 r270
  text "PG" at 16.76,-6.057 h1.52
  text "3V3" at -0.686,-6.349 h1.52
  text "MOTOR" at -19.501,-9.659 h1.6
  text "PD STEPPER" at -20.447,-11.287 h1.3
  text "THINGSBYJOSH" at -20.193,-12.181 h1
  text "1" at -5.995,-20.325 h2
  text "2" at 3.049,-20.331 h2
  text "3" at 12.066,-20.32 h2
Bottom Overlay:
  drawing of 52 lines, arcs and shapes, not listed
  text "PD STEPPER" at 8.39,17.046 h3
  text "V1.1" at -10.795,16.637 h1.7 r270
  text "0" at -0.697,14.08 h1.52 r180
  text "1" at -6.347,13.208 h1.52
  text "1" at -7.493,13.073 h1.52 r90
  text "PG  / 3V3" at 9.017,7.747 h1
  text "GND" at 5.334,7.631 h1
  text "3V3" at 13.97,7.631 h1
  text "0" at -7.51,6.85 h1.52 r90
  text "TMC EN" at 2.921,5.599 h1
  text "0" at -18.542,-9.127 h1.52
  text "1" at -12.319,-9.144 h1.52
  text "VBUS" at 4.444,-10.016 h1.52
  text "GND" at 4.318,-13.191 h1.52
  text "VREF" at 8.889,-18.034 h1
Top Paste:
  region: 19.9,4.325 cw(c19.45,4.325) 19.45,3.875 19.05,3.875 19.05,4.025 19.45,4.025 ccw(c19.45,4.325) 19.75,4.325
  region: 18.2,4.325 cw(c18.65,4.325) 18.65,4.775 19.05,4.775 19.05,4.625 18.65,4.625 ccw(c18.65,4.325) 18.35,4.325
  region: 18.2,4.325 ccw(c18.65,4.325) 18.65,3.875 19.05,3.875 19.05,4.025 18.65,4.025 cw(c18.65,4.325) 18.35,4.325
  region: 19.9,4.325 ccw(c19.45,4.325) 19.45,4.775 19.05,4.775 19.05,4.625 19.45,4.625 cw(c19.45,4.325) 19.75,4.325
  region: 19.9,-4.325 ccw(c19.45,-4.325) 19.45,-3.875 19.05,-3.875 19.05,-4.025 19.45,-4.025 cw(c19.45,-4.325) 19.75,-4.325
  region: 18.2,-4.325 ccw(c18.65,-4.325) 18.65,-4.775 19.05,-4.775 19.05,-4.625 18.65,-4.625 cw(c18.65,-4.325) 18.35,-4.325
  region: 18.2,-4.325 cw(c18.65,-4.325) 18.65,-3.875 19.05,-3.875 19.05,-4.025 18.65,-4.025 ccw(c18.65,-4.325) 18.35,-4.325
  region: 19.9,-4.325 cw(c19.45,-4.325) 19.45,-4.775 19.05,-4.775 19.05,-4.625 19.45,-4.625 ccw(c19.45,-4.325) 19.75,-4.325
  region: 15.73,-4.325 15.88,-4.325 cw(c15.43,-4.325) 15.43,-4.775 14.33,-4.775 cw(c14.33,-4.325) 13.88,-4.325 14.03,-4.325 ccw(c14.33,-4.325) 14.33,-4.625 15.43,-4.625 ccw(c15.43,-4.325)
  region: 14.03,-4.325 13.88,-4.325 cw(c14.33,-4.325) 14.33,-3.875 15.43,-3.875 cw(c15.43,-4.325) 15.88,-4.325 15.73,-4.325 ccw(c15.43,-4.325) 15.43,-4.025 14.33,-4.025 ccw(c14.33,-4.325)
  region: 14.03,4.325 13.88,4.325 cw(c14.33,4.325) 14.33,4.775 15.43,4.775 cw(c15.43,4.325) 15.88,4.325 15.73,4.325 ccw(c15.43,4.325) 15.43,4.625 14.33,4.625 ccw(c14.33,4.325)
  region: 15.73,4.325 15.88,4.325 cw(c15.43,4.325) 15.43,3.875 14.33,3.875 cw(c14.33,4.325) 13.88,4.325 14.03,4.325 ccw(c14.33,4.325) 14.33,4.025 15.43,4.025 ccw(c15.43,4.325)
Bottom Solder:
  rectangle: -9.144,-13.97 -4.445,-9.779
Board Outline:
  the board outline again, w0.1

## Text inside footprints (layer, text, board x,y; h text height)
J4: Mechanical 13 "PCB EDGE" at 20.95,5.2 h0.61 r90
U4: Mechanical 13 "*" at 6.939,-2.648 h1.27